# Altium PCB WG-DH-MB V1.0.PcbDoc
Units mil, origin at the board's own origin, x right, y up, seen from the top; angles counter-clockwise.
Board outline 3784.52 x 3519.17 mil, 4 copper layers (Top Layer, VCC, GND, Bottom Layer); 82 components, 63 nets, 293 pads, 116 vias.
Unrouted connection lines stored in the file: 2.
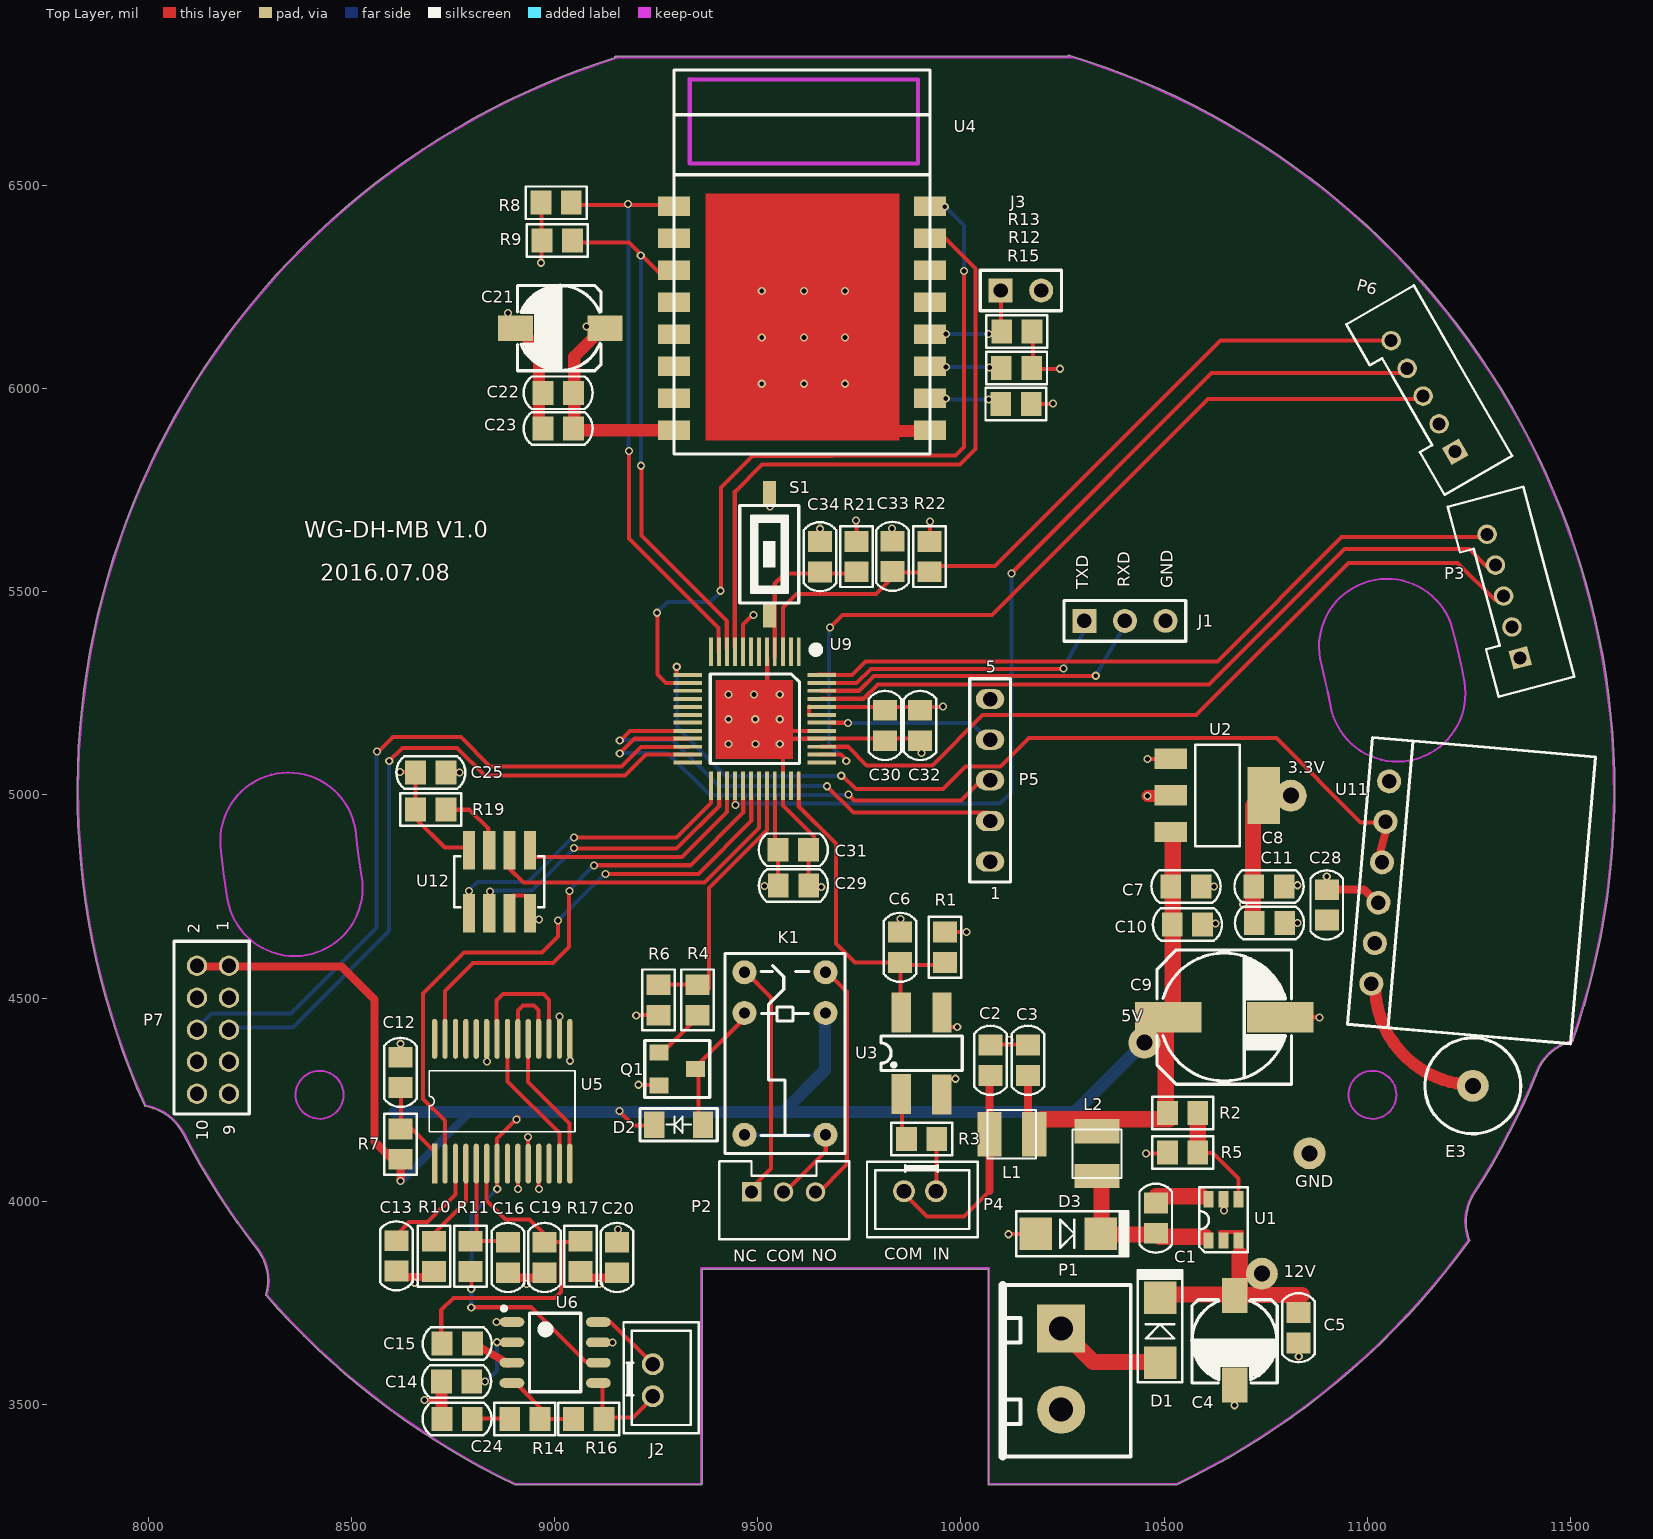
[diagram p0: Top Layer view]
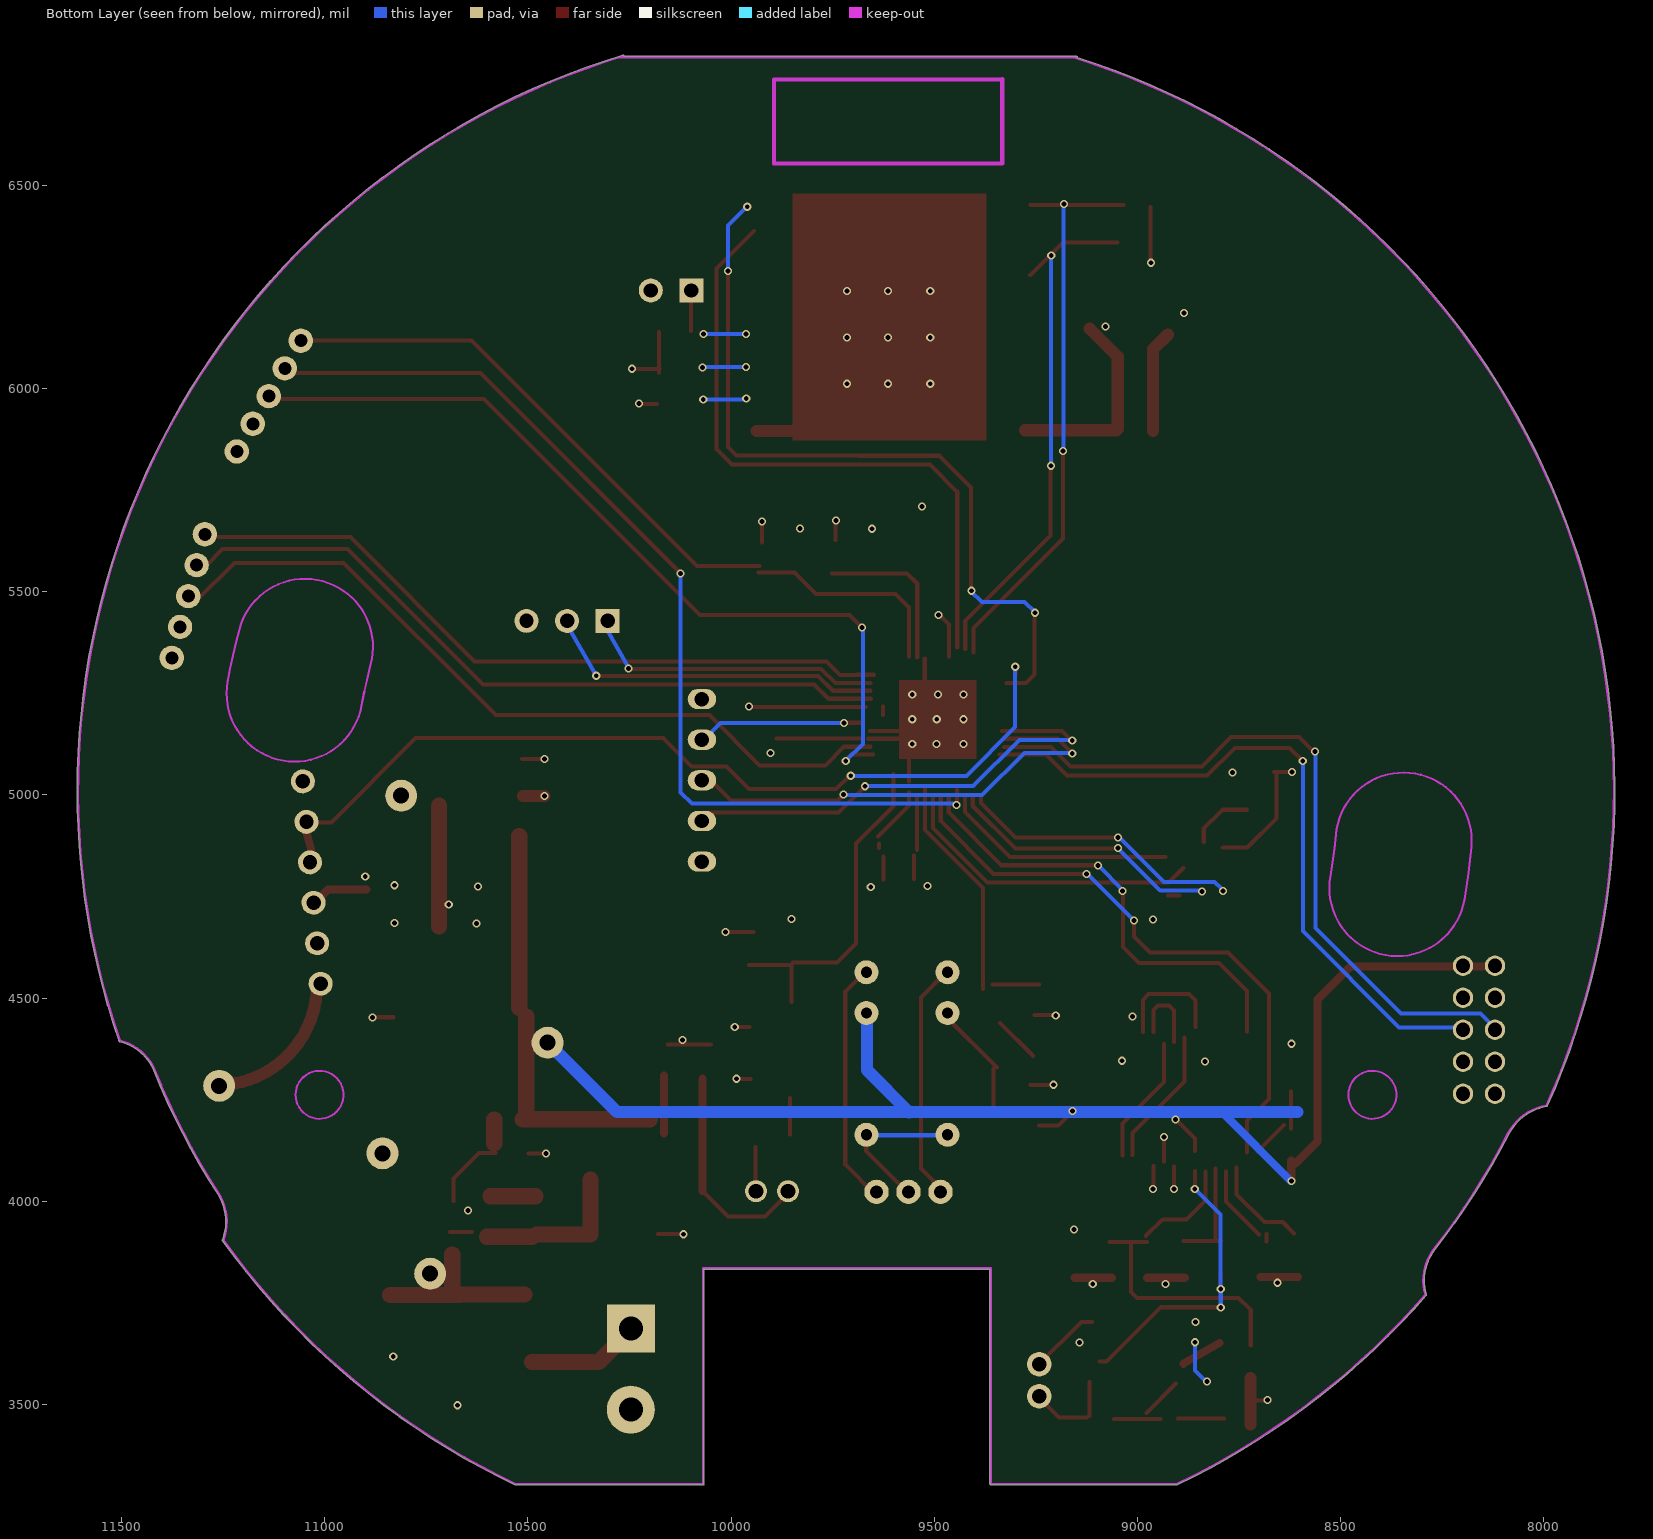
[diagram p1: Bottom Layer view, seen from below]
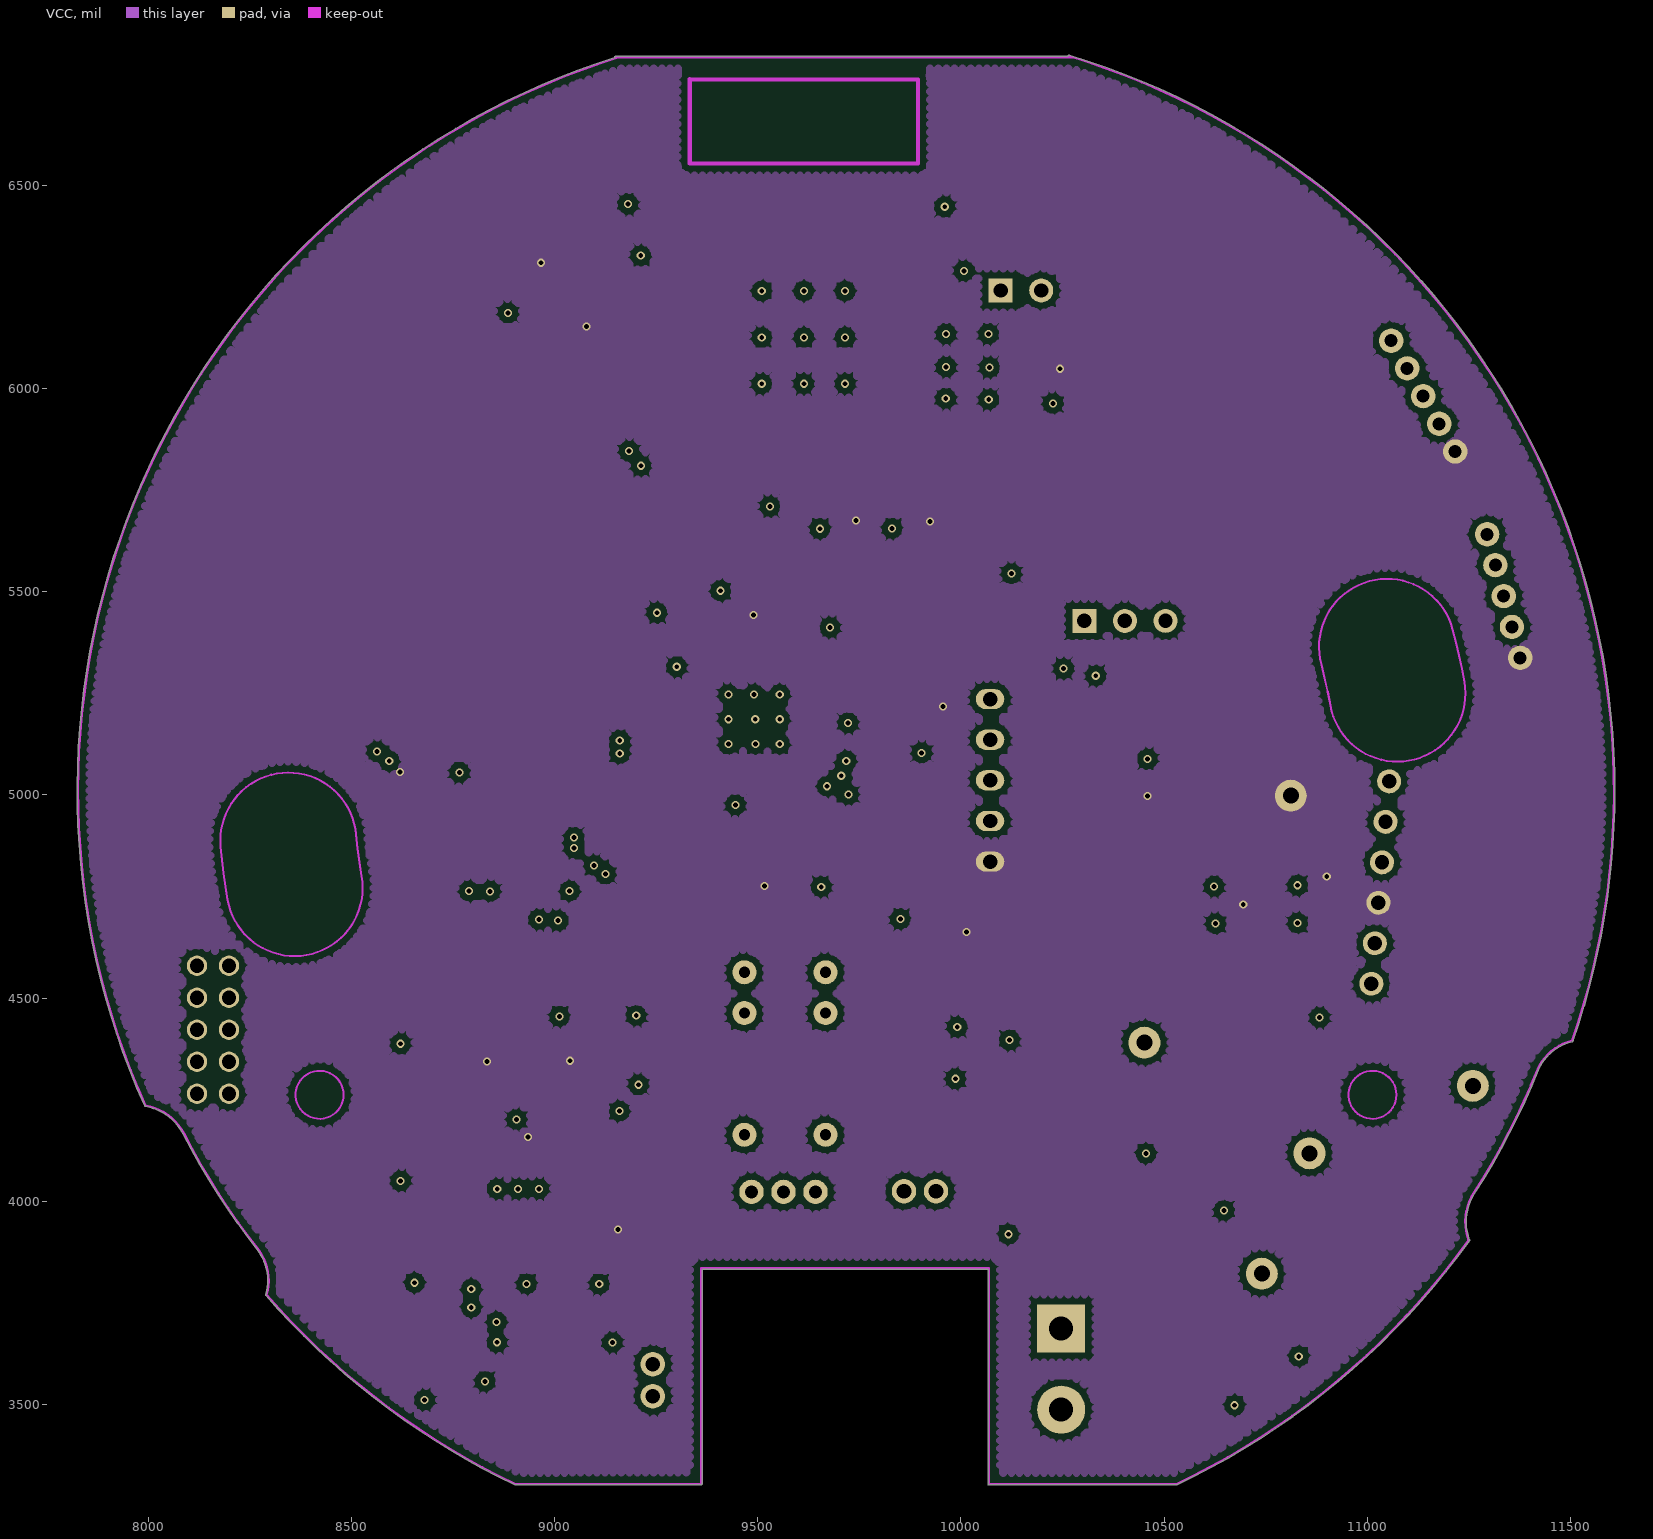
[diagram p2: VCC]
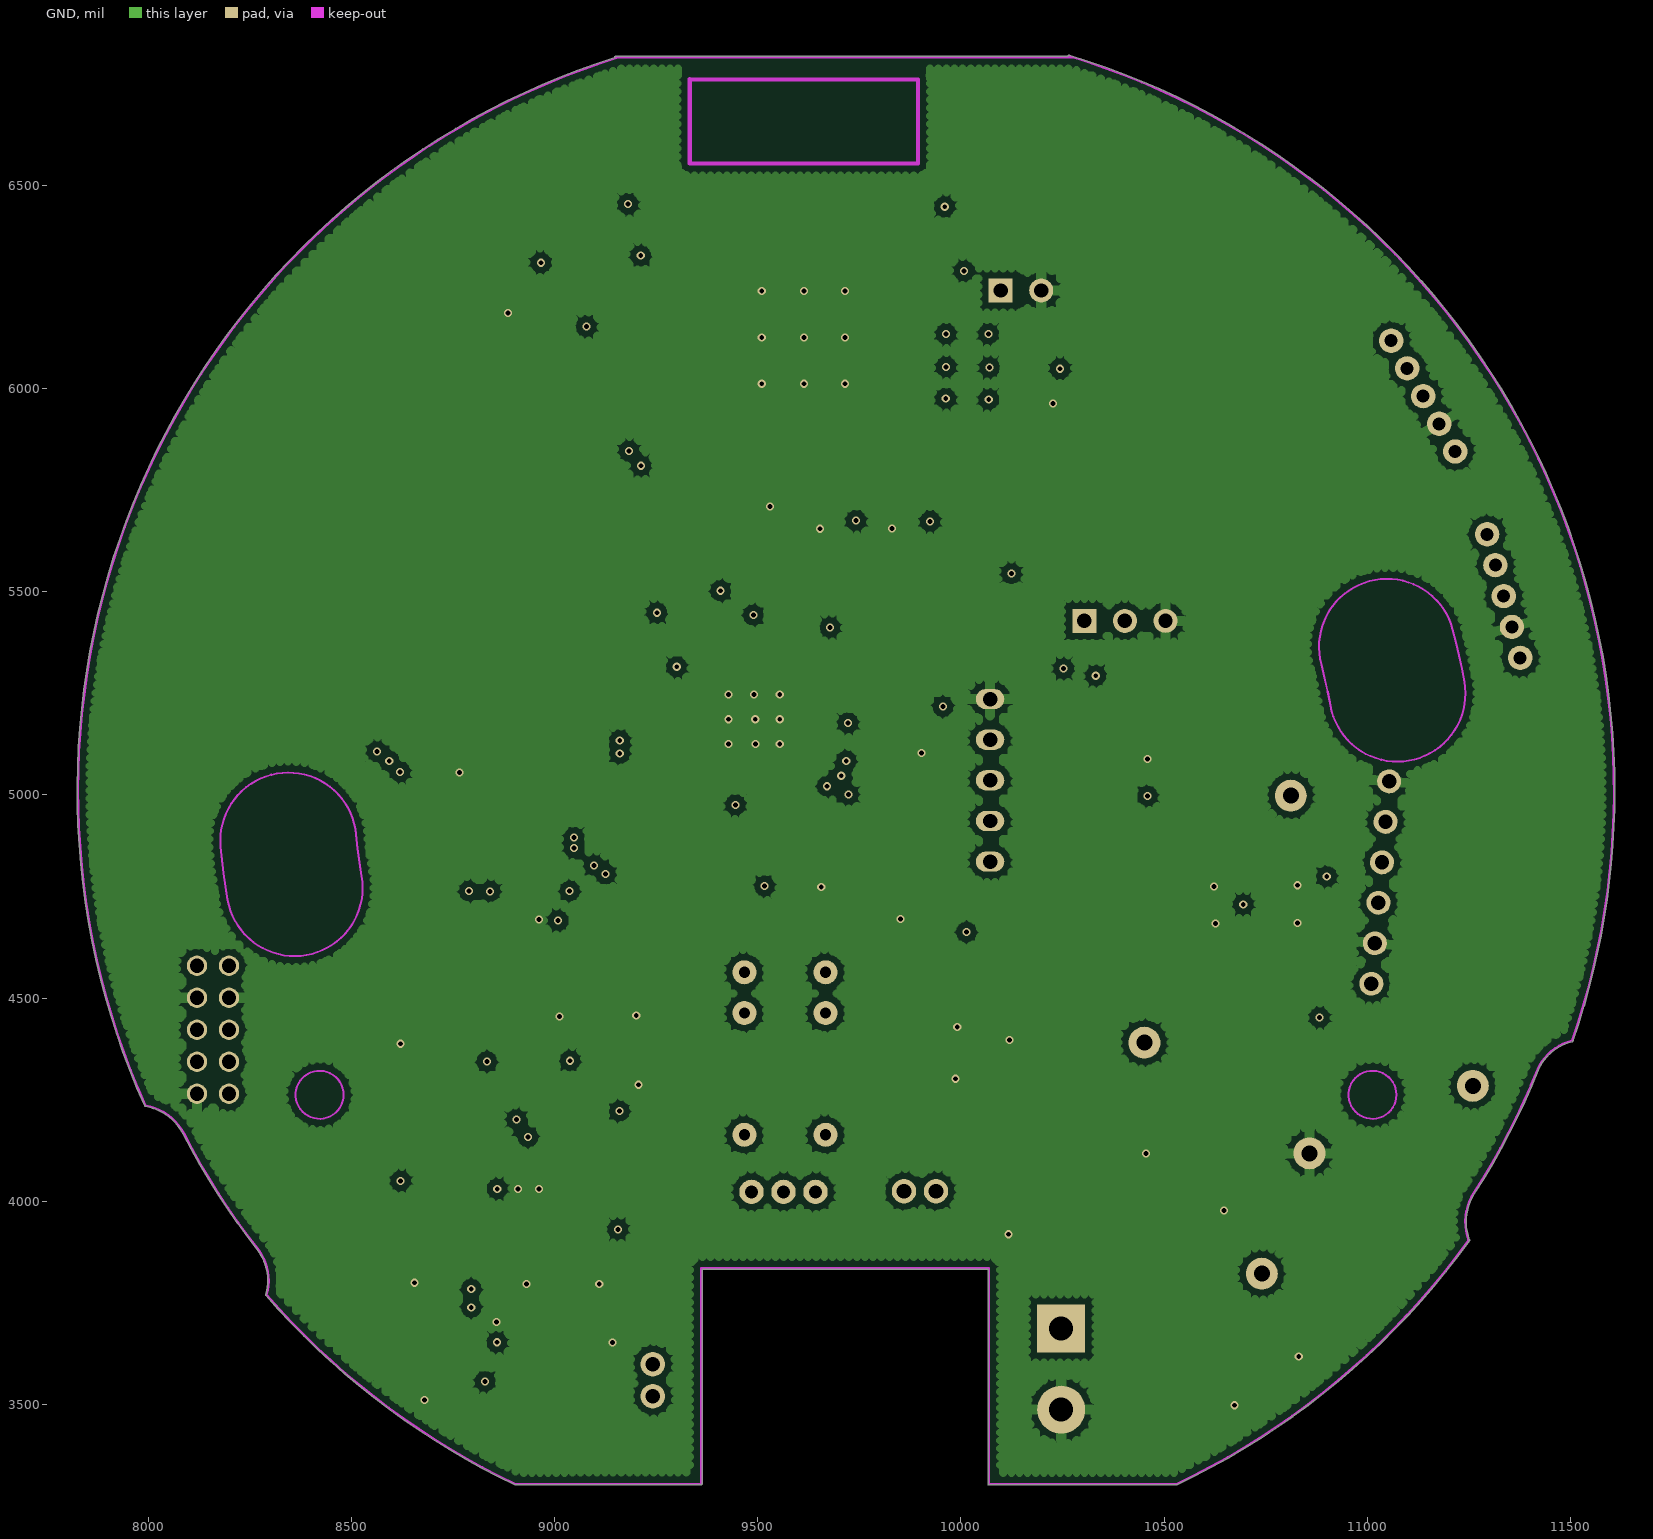
[diagram p3: GND]

## Layer stack, top to bottom
Top Layer: signal copper 1.4
Dielectric: core 12.6, FR-4, Dk 4.8
VCC: signal copper 1.4
Dielectric: prepreg 12.6, FR-4, Dk 4.8
GND: signal copper 1.4
Dielectric: core 12.6, FR-4, Dk 4.8
Bottom Layer: signal copper 1.4

## Board outline
8270.48,3877.31 ccw(c9717.08,5009.79) 8270.51,3877.27 8270.48,3877.31 cw(c8170.37,3805.04) 8293.84,3805.04 cw(c8170.37,3805.04) 8288.84,3770.24 ccw(c8291.25,3769.54) 8289.35,3767.89 ccw(c9717.08,5009.79) 8902.77,3301.68 ccw(c8903.85,3303.95) 8903.86,3301.44 9360.68,3302.48 ccw(c9360.67,3305) 9363.18,3305 9363.18,3832.64 10066.82,3832.64 10066.82,3303.95 ccw(c10069.33,3303.95) 10069.67,3301.46 ccw(c10070,3303.95) 10070,3301.44 10530.31,3301.44 ccw(c10530.31,3303.95) 10531.39,3301.68 ccw(c9717.08,5009.79) 11251.34,3902.19 ccw(c11249.3,3903.66) 11251.81,3903.66 ccw(c11249.3,3903.66) 11251.65,3904.57 cw(c11372.12,3949.28) 11263.92,4018.61 ccw(c9717.08,5009.79) 11421.14,4323.24 ccw(c9717.08,5009.79) 11421.16,4323.28 11421.14,4323.24 cw(c11533.78,4272.68) 11504.68,4392.67 ccw(c11504.08,4395.11) 11506.46,4394.29 ccw(c9717.08,5009.79) 11609.36,5009.79 ccw(c9717.08,5009.79) 10266.67,6820.5 ccw(c10265.94,6818.09) 10263.49,6817.51 9161.38,6817.51 ccw(c9159.84,6815.53) 9159.1,6817.93 ccw(c9717.08,5009.79) 9157.75,6817.51 9150,6817.51 ccw(c9150,6815) 9147.57,6814.33 ccw(c9717.08,5009.79) 7990.74,4234.88 ccw(c7993.04,4235.91) 7992.64,4233.43 ccw(c7971.13,4106.74) 7992.62,4233.43 7992.64,4233.43 cw(c7971.13,4106.74) 8085.26,4165.79 cw(c7971.13,4106.74) 8085.27,4165.77 ccw(c9717.08,5009.79)

## Design rules (kind name [scope] priority, off if disabled: settings)
Clearance [All] p1: gap=15
PolygonConnect isP7-1 [InComponent('P7')and InNet('VDD33')] p1: connectstyle=Relief reliefconductorwidth=25 reliefentries=4 polygonreliefangle="90 Angle"
PolygonConnect IsGndPin [IsPadHoleValid AND InNet('GND')] p2: connectstyle=Relief reliefconductorwidth=25 reliefentries=4 polygonreliefangle="90 Angle"
PolygonConnect IsVia [IsVia] p3: connectstyle=Direct reliefconductorwidth=10 reliefentries=4 polygonreliefangle="90 Angle"
PolygonConnect [All] p4: connectstyle=Direct reliefconductorwidth=20 reliefentries=4 polygonreliefangle="90 Angle"
RoutingVias [All] p1: holewidth=12 width=20 viastyle="Through Hole" minholewidth=12 minwidth=20 maxholewidth=12 maxwidth=20
SilkToSilkClearance [All] p1: silktosilkclearance=0
SilkscreenOverComponentPads [IsPad] p1: minsilkscreentomaskgap=0
SolderMaskExpansion [All] p1: expansion=4
Width [All] p1: maxlimit=100 minlimit=10 preferedwidth=10 midlayer1_maxwidth=10 midlayer2_maxwidth=10 minimp=50.000000 maximp=50.000000 favimp=50.000000
26 further rules are at their usual default settings.

## Components (designator, comment, footprint, x,y, rotation, side; value= is the part's Value field where it differs from the comment)
3.3V "5VOUT" TestPoint 10811.81,4998.03 r180 top (schematic designator 3)
5V "5VOUT" TestPoint 10451.57,4390.16 r90 top (schematic designator 2)
12V "5VOUT" TestPoint 10740.55,3821.65 r180 top (schematic designator 1)
C1 "22nF" "0805 - C" 10479.53,3958.27 r90 top
C2 "10uF" "0805 - C" 10072.83,4346.85 r90 top
C3 "10uF" "0805 - C" 10164.96,4346.85 r90 top
C4 "47uF/16V" smd_ec_d5.2 10673.62,3657.48 r180 top
C5 "0.1uF" "0805 - C" 10830.71,3688.58 r90 top
C6 "0.1uF" "0805 - C" 9850,4624.8 r270 top
C7 "0.1uF" "0805 - C" 10553.94,4774.8 r180 top
C8 "0.1uF" "0805 - C" 10758.27,4774.8 r180 top
C9 "220uF/25V" smd_ec_d8 10648.03,4453.15 r270 top
C10 "10uF" "0805 - C" 10557.48,4681.1 r0 top
C11 "10uF" "0805 - C" 10759.45,4684.65 r0 top
C12 "1uF" "0805 - C" 8620.47,4316.93 r270 top
C13 "0.1uF" "0805 - C" 8610.24,3865.35 r90 top
C14 "4.7uF" "0805 - C" 8758.66,3556.3 r180 top
C15 "0.1uF" "0805 - C" 8760.24,3649.21 r0 top
C16 "0.1uF" "0805 - C" 8885.04,3861.42 r90 top
C19 "0.1uF" "0805 - C" 8975.2,3861.42 r270 top
C20 "0.1uF" "0805 - C" 9153.54,3861.42 r270 top
C21 "47uF" SMD_EC_D5.2 9013.78,6148.82 r90 top
C22 "1uF" "0805 - C" 9008.66,5989.76 r180 top
C23 "10nF" "0805 - C" 9008.66,5901.97 r0 top
C24 "0.1uF" "0805 - C" 8759.84,3464.17 r0 top
C25 "0.1uF" "0805 - C" 8695.28,5055.12 r180 top
C28 "1uF" "0805 - C" 10900.39,4729.13 r270 top
C29 "10uF" "0805 - C" 9587.8,4776.77 r0 top
C30 "10uF" "0805 - C" 9812.99,5170.87 r270 top
C31 "0.1uF" "0805 - C" 9587.4,4864.96 r180 top
C32 "0.1uF" "0805 - C" 9899.61,5170.87 r90 top
C33 "1uF" "0805 - C" 9831.5,5587.01 r270 top
C34 "0.1uF" "0805 - C" 9653.15,5586.22 r270 top
D1 "1N5817" SMD_DIODE_SMA 10490.16,3692.52 r90 top
D2 "1N4148" 1n4148 9310.24,4188.19 r180 top
D3 "1N5817" SMD_DIODE_SMA 10274.41,3919.69 r0 top
E3 "Antenna" ant 11259.84,4283.86 r0 top
GND "5VOUT" TestPoint 10857.87,4117.72 r180 top (schematic designator GND1)
J1 "Header 3" HDR1X3 10303.54,5428.35 r0 top
J2 "喇叭接口" CN_1X2_P200#1 9242.13,3559.06 r270 top
J3 "Jumper" HDR1X2 10097.6,6241.48 r0 top
K1 "HFD41" HFD23 9566.93,4363.39 r0 top
L1 "4.7uH" SMD_L_3015 10125.2,4164.57 r0 top
L2 "4.7uH" SMD_L_3015 10335.04,4116.93 r90 top
P1 "Header 2" CON2-5.08 10246.85,3687.01 r270 top
P2 "Header 3" CN_1X3_P200 9564.57,3983.07 r180 top
P3 "Header 5" CN_1X5_P200 11335.83,5489.37 r285 top
P4 "Header 2" CN_1X2_P200#2 9898.82,4024.02 r180 top
P5 "Header 5" HDR1X5 10071.65,4835.83 r90 top locked
P6 "Header 5" CN_1X5_P200 11137.8,5981.5 r300 top
P7 "Header 5X2" HDR2X5 8198.43,4264.57 r90 top
Q1 "NPN" SOT23 9301.97,4325.2 r270 top
R1 "10K" "0805 - R" 9960.24,4624.8 r270 top
R2 "150K" "0805 - R" 10545.67,4217.32 r180 top
R3 "1K" "0805 - R" 9903.15,4153.54 r0 top
R4 "4.7K" "0805 - R" 9351.97,4495.28 r270 top
R5 "28.7K" "0805 - R" 10545.67,4120.08 r0 top
R6 "10K" "0805 - R" 9255.51,4495.28 r270 top
R7 "10" "0805 - R" 8620.47,4140.55 r90 top
R8 "10K" "0805 - R" 9003.68,6457.47 r180 top
R9 "10K" "0805 - R" 9006.19,6364.21 r180 top
R10 "300K" "0805 - R" 8703.15,3864.17 r270 top
R11 "1K" "0805 - R" 8793.31,3864.17 r270 top
R12 "10K" "0805 - R" 10136.85,6050.78 r0 top
R13 "10K" "0805 - R" 10137.69,6140.7 r0 top
R14 "3K" "0805 - R" 8926.77,3464.17 r0 top
R15 "10K" "0805 - R" 10135.46,5961.98 r180 top
R16 "75K" "0805 - R" 9083.86,3464.17 r180 top
R17 "1K" "0805 - R" 9063.71,3864.17 r90 top
R19 "10K" "0805 - R" 8695.28,4964.57 r180 top
R21 "10K" "0805 - R" 9742.91,5586.61 r270 top
R22 "10K" "0805 - R" 9922.44,5586.61 r270 top
S1 "SW-PB" SW_SMD_2P 9528.35,5592.52 r90 top
U1 "ACT4088" SOT23-6 10646.46,3953.94 r0 top
U2 "LM1117-3.3" SOT223 10655.91,4998.82 r270 top
U3 "EL357N" SOP4 9853.15,4263.39 r90 top
U4 "ESP-12F" WIFI-ESP 9608.66,5839.37 r0 top
U5 "WT588D08" WT588D08 8704.72,4092.52 r90 top locked
U6 "MC34119" MC34119 9001.18,3627.56 r0 top locked
U9 "LPC1125FBD48/333" TQFP48 9492.91,5187.4 r270 top locked
U11 "TDH0018" TDH0018 11256.69,4764.57 r265 top locked
U12 "W25Q16" CN_4X2P_1.27MM 8868.5,4785.04 r0 top

## Footprints (in the part's own frame and the unit in brackets; to place one, negate y for a bottom-side part, rotate by r counter-clockwise, add the part's x,y. Pads: shape width x height; smd on the part's side, far side on the other; paste and mask are expansions set on the pad)
1n4148 [mil] "1N4148"
  rect 50x64.2 smd: 1(-54.7,0) 2(64.9,0)
  silkscreen extent -90,-40 100,40
"0805 - C" [mm] "SMD_CAP_0805"
  rect 1.3x1.5 smd: 1(-0.95,0) 2(0.95,0)
  silkscreen extent -2.16,-1.02 2.16,1.02
"0805 - R" [mm]
  rect 1.3x1.5 smd: 1(-0.95,0) 2(0.95,0)
  silkscreen extent -1.91,-1.02 1.91,1.02
ant [mm]
  round 2 hole 1: 1(0,0)
  silkscreen extent -3,-3 3,3
CN_1X2_P200#1 [mil]
  round 54 / inner round 60 / far side round 60 hole 36: 1(38.99,-0.51) 2(-39.75,-0.51)
  silkscreen extent -143,-73 130,113
CN_1X2_P200#2 [mil]
  round 54 / inner round 60 / far side round 54 hole 36: 1(38.99,-0.51) 2(-39.75,-0.51)
  silkscreen extent -143,-73 130,113
CN_1X3_P200 [mil]
  rect 48x48 / inner round 60 / far side round 60 hole 32: 1(80,-39.69)
  round 48 / inner round 60 / far side round 60 hole 32: 2(1.26,-39.69) 3(-77.48,-39.69)
  silkscreen extent -160,-115 159,76
CN_1X5_P200 [mil]
  rect 48x48 / inner round 60 / far side round 60 hole 32: 1(157.48,0)
  round 48 / inner round 60 / far side round 60 hole 32: 2(78.74,0) 3(0,0) 4(-78.74,0) 5(-157.48,0)
  silkscreen extent -248,-76 236,116
CN_4X2P_1.27MM [mil]
  rect 30x95 smd: 1(-79.4,-76.5) 2(-29.4,-76.5) 3(20.6,-76.5) 4(70.6,-76.5) 5(70.6,78.5) 6(20.6,78.5) 7(-29.4,78.5) 8(-79.4,78.5)
  silkscreen extent -116,-62 106,64
CON2-5.08 [mm]
  rect 3x3 hole 1.5: 1(0,0)
  round 3 hole 1.5: 2(5.08,0)
  silkscreen extent -2.7,-3.66 8,4.34
HDR1X2 [mm] "Connector; Header; 2 Position"
  rect 1.5x1.5 hole 0.9: 1(0,0)
  round 1.5 hole 0.9: 2(2.54,0)
  silkscreen extent -1.27,-1.27 3.81,1.27
HDR1X3 [mm] "Connector; Header; 3 Position"
  rect 1.5x1.5 hole 0.9: 1(0,0)
  round 1.5 hole 0.9: 2(2.54,0) 3(5.08,0)
  silkscreen extent -1.27,-1.27 6.35,1.27
HDR1X5 [mil] "Connector; Header; 5x2 Position"
  oval 50x70 hole 35.43: 1(0,0) 2(100,0) 3(200,0) 4(300,0) 5(400,0)
  silkscreen extent -50,-50 450,50
HDR2X5 [mm] "Connector; Header; 5x2 Position"
  round 1.27 hole 0.9: 1(8,0) 2(8,2) 3(6,0) 4(6,2) 5(4,0) 6(4,2) 7(2,0) 8(2,2) 9(0,0) 10(0,2)
  silkscreen extent -1.27,-1.27 9.53,3.43
HFD23 [mm]
  round 1.5 hole 0.7: 1(-2.54,-5.08) 1(2.54,-5.08) 2(-2.54,5.08) 3(2.54,5.08) 4(-2.54,2.54) 5(2.54,2.54)
  silkscreen extent -3.75,-6.25 3.75,6.25
MC34119 [mm]
  oval 1.55x0.6 smd: 1(-2.7,1.905) 2(-2.7,0.635) 3(-2.7,-0.635) 4(-2.7,-1.905) 5(2.7,-1.905) 6(2.7,-0.635) 7(2.7,0.635) 8(2.7,1.905)
  silkscreen extent -3.32,-2.45 1.6,2.87
SMD_DIODE_SMA [mil] "SMD_DIODE_SMA"
  rect 80x80 smd: 1(-90.5,0) 2(69.5,0)
  silkscreen extent -138,-55 140,55
smd_ec_d5.2 [mm]
  rect 1.6x2.2 smd: 1(0,-2.794) 2(0,2.794)
  silkscreen extent -2.67,-2.54 2.67,2.67
SMD_EC_D5.2 [mm]
  rect 1.6x2.2 smd: 1(0,-2.794) 2(0,2.794)
  silkscreen extent -2.67,-2.54 2.67,2.67
smd_ec_d8 [mm]
  rect 1.9x4.15 smd: 1(0,-3.5) 2(0,3.5)
  silkscreen extent -4.2,-4.2 4.2,4.2
SMD_L_3015 [mil] "SMD_3015"
  rect 60x110 smd: 1(-55,0) 2(55,0)
  silkscreen extent -60,-60 60,60
SOP4 [mm]
  rect 2.5x1.2 smd: 1(0,0) 2(-0.01,-2.53) 3(5.12,-2.54) 4(5.12,0)
  silkscreen extent 1.48,-3.81 3.64,1.27
SOT23 [mm] "SOT23"
  rect 1x1.2 smd: 1(0,1.141) 2(-1.021,-1.141) 3(1.021,-1.14)
  silkscreen extent -1.78,-2.03 1.78,2.03
SOT23-6 [mil] "SOT23-6"
  rect 25x40 smd: 1(-37,-51) 2(0,-51) 3(37,-51) 4(37,51) 5(0,51) 6(-37,51)
  silkscreen extent -60,-80 60,80
SOT223 [mil] "SOT223"
  rect 50x80 smd: 1(-90.2,-139.8) 2(0,-139.8) 3(90.2,-139.8)
  rect 140x80 smd: 4(0,90)
  silkscreen extent -125,-80 125,30
SW_SMD_2P [mil] "SMD_SW_2P"
  rect 60x32 smd: 1(150,0) 2(-150,0)
  silkscreen extent -120,-73 120,73
TDH0018 [mm]
  round 1.5 hole 0.9: 1(-6.35,-5.73) 2(-3.81,-5.73) 3(-1.27,-5.73) 4(1.27,-5.73) 5(3.81,-5.73) 6(6.35,-5.73)
  silkscreen extent -9,-7 9,7
TestPoint [mm]
  round 2 hole 1: 1(0,0)
TQFP48 [mil] "TQFP48"
  rect 70.1x9.8 smd: 1(-165,107.9) 2(-165,89) 3(-165,68.9) 4(-165,48.8) 5(-165,29.9) 6(-165,9.8) 7(-165,-9.8) 8(-165,-29.1) 9(-165,-48.8) 10(-165,-68.9) 11(-165,-88.2) 12(-165,-107.9) 25(165,-107.9) 26(165,-88.2) 27(165,-68.9) 28(165,-48.8) 29(165,-29.1) 30(165,-9.8) 31(165,9.8) 32(165,29.9) 33(165,48.8) 34(165,68.9) 35(165,89) 36(165,107.9)
  rect 9.8x70.1 smd: 13(-107.9,-165) 14(-88.2,-165) 15(-68.9,-165) 16(-48.8,-165) 17(-29.1,-165) 18(-9.8,-165) 19(9.8,-165) 20(29.9,-165) 21(48.8,-165) 22(68.9,-165) 23(88.2,-165) 24(107.9,-165) 37(107.9,165) 38(88.2,165) 39(68.9,165) 40(48.8,165) 41(29.9,165) 42(9.8,165) 43(-9.8,165) 44(-29.1,165) 45(-48.8,165) 46(-68.9,165) 47(-88.2,165) 48(-107.9,165)
  silkscreen extent -184,-110 110,164
WIFI-ESP [mm]
  rect 2x1.2 smd: 1(-8,15.48) 2(-8,13.48) 3(-8,11.48) 4(-8,9.48) 5(-8,7.48) 6(-8,5.48) 7(-8,3.48) 8(-8,1.48) 15(8,1.48) 16(8,3.48) 17(8,5.48) 18(8,7.48) 19(8,9.48) 20(8,11.48) 21(8,13.48) 22(8,15.48)
  silkscreen extent -8,0 8,24
WT588D08 [mm]
  rect 2.5x0.33 smd: 1(0,0)
  oval 2.5x0.33 smd: 2(0,-0.65) 3(0,-1.3) 4(0,-1.95) 5(0,-2.6) 6(0,-3.25) 7(0,-3.9) 8(0,-4.55) 9(0,-5.2) 10(0,-5.85) 11(0,-6.5) 12(0,-7.15) 13(0,-7.8) 14(0,-8.45) 15(7.8,-8.45) 16(7.8,-7.8) 17(7.8,-7.15) 18(7.8,-6.5) 19(7.8,-5.85) 20(7.8,-5.2) 21(7.8,-4.55) 22(7.8,-3.9) 23(7.8,-3.25) 24(7.8,-2.6) 25(7.8,-1.95) 26(7.8,-1.3) 27(7.8,-0.65) 28(7.8,0)
  silkscreen extent 1.98,-8.78 5.82,0.33

## Part data
3.3V 5V 12V GND: library part TESTPOINT
C1 C5 C6 C7 C8 C12 C13 C14 C15 C16 C19 C20 C23 C24 C25 C31 C32 C33 C34: library part Cap, "Capacitor"
C2 C3 C4 C9 C10 C11 C21 C22 C28 C29 C30: library part "Cap Pol1", "Polarized Capacitor (Radial)"
D1 D2 D3: library part Diode, "Default Diode"
E3: "Generic Antenna"
J1 P2: "Header, 3-Pin"
J2: library part "Header 2", "Header, 2-Pin"
J3: "Jumper Wire"
K1: library part Relay-SPDT, "Single-Pole Dual-Throw Relay"
L1 L2: library part Inductor, "Inductor"
P1 P4: "Header, 2-Pin"
P3 P5 P6: "Header, 5-Pin"
P7: "Header, 5-Pin, Dual row"
Q1: "NPN Bipolar Transistor"
R1 R2 R3 R4 R5 R6 R7 R8 R9 R10 R11 R12 R13 R14 R15 R16 R17 R21 R22: library part Res1, "Resistor"
R19: library part Res3, "Resistor"
S1: "Switch"
U2: library part LM1117_1
U3: library part Optoisolator1, "4-Pin Phototransistor Optocoupler"
U12: library part MX25Lxx

## Via types
v1: diameter 20, hole 12, Top Layer to Bottom Layer, 116 vias

## Nets (pads, with @x,y where several pads share a name; then routed paths per layer and width w, separated by ;. In a path a pad name is that pad's centre, name@x,y a point inside that pad or via, vN(x,y) a via of type N, cw(c..) or ccw(c..) an arc to the next point about the centre after c; other vN are vias at no path point)
AUDIOINPUT: C15.1 C19.1 R17.2 U5.6 | length 867.9
  Top Layer w10: C15.1@8720.87,3645.28 8720.87,3731.89 8750.79,3761.81 9001.18,3761.81 9015.77,3776.4 9015.77,3899.46 ; U5.6@8832.68,4072.44 8832.68,4001.57 8879.13,3955.12 8938.58,3955.12 C19.1@8978.74,3914.96 ; C19.1@8976.77,3900 R17.2@9068.9,3900
BLE_RX: P7.6 U9.22 | length 1810.3
  Top Layer w10: v1@8562.6,5103.15 8601.57,5142.13 8769.29,5142.13 8841.34,5070.08 9164.57,5070.08 9212.61,5118.12 U9.22@9327.95,5118.12
  Bottom Layer w10: P7.6@8116.63,4422.93 8155.51,4461.81 8350.79,4461.81 8561.81,4672.83 v1@8561.81,5103.15
  other v1: 8562.6,5106.69
BLE_TX: P7.5 U9.23 | length 1727.2
  Top Layer w10: v1@8591.54,5082.09 8625.2,5115.75 8759.84,5115.75 8828.35,5047.24 9172.83,5047.24 9224.82,5099.23 U9.23@9339.37,5099.23
  Bottom Layer w10: P7.5@8191.73,4427.56 8355.51,4427.56 8592.52,4664.57 v1@8592.52,5081.1
  other v1: 8592.91,5083.07
BOOT: C34.2 R21.2 S1.2 U9.4 | length 402
  Top Layer w10: U9.4@9541.74,5338.58 9541.74,5520.09 9566.54,5544.88 R21.2@9751.97,5544.88
BUSY: U5.2 U9.30 | length 1477.9
  Top Layer w10: U5.2@8730.32,4120.47 8730.31,4198.03 8676.38,4251.97 8676.38,4511.42 8776.77,4611.81 8969.29,4611.81 9008.66,4651.18 v1@9008.66,4689.76 ; v1@9120.47,4805.51 9353.54,4805.51 9483.86,4935.83 U9.30@9483.86,4995.67
  Bottom Layer w10: v1@9009.65,4692.32 v1@9121.85,4804.53
  other v1: 9008.66,4690.55 9124.8,4805.12
COM1: K1.1 P2.2 | length 353.7
  Top Layer w10: P2.2@9565.35,4021.65 9667.32,4123.62 K1.1@9667.32,4174.41
  Bottom Layer w10: K1.1@9486.37,4162.29 K1.1@9645.05,4162.29
DATA: U5.27 U9.29 | length 1125.5
  Top Layer w10: U5.27@8730.32,4418.11 8730.31,4517.72 8799.21,4586.61 8996.46,4586.61 9035.83,4625.98 v1@9035.83,4759.06 ; v1@9097.64,4826.77 9334.25,4826.77 9464.17,4956.69 U9.29@9464.17,4994.49
  Bottom Layer w10: v1@9036.22,4766.14 v1@9095.87,4825.79
  other v1: 9037.01,4763.39 9097.24,4826.38
FLH_NSCS: U9.25 U12.1 | length 692.7
  Top Layer w10: v1@9046.06,4895.28 9299.61,4895.28 9384.65,4980.31 U9.25@9384.65,4996.06
  Bottom Layer w10: v1@8793.31,4769.29 8809.84,4785.83 8934.25,4785.83 v1@9044.09,4895.67
  other v1: 8789.37,4762.99 9048.03,4894.88
GND: C2.2 C3.2 C4.2 C5.1 C6.1 C7.1 C8.1 C9.2 C10.2 C11.2 C12.1 C13.1 C14.2 C16.1 C19.2 C20.2 C21.2 C22.2 C23.1 C24.1 C25.1 C28.2 C29.2 C30.2 C31.1 C32.1 C33.1 C34.1 D3.1 GND.1 J1.3 J3.2 P1.2 P3.2 P5.5 P6.2 P7.3 P7.4 P7.10 Q1.3 R5.1 R6.2 R10.2 R15.1 R17.1 S1.1 U1.5 U2.1 U3.2 U3.3 U4.15 U5.9 U5.11 U5.16 U6.1 U6.7 U9.5 U9.34 U9.40 U9.41 U11.1 U11.5 U12.3 U12.4 | length 2231.9
  Top Layer w10: v1@8680.32,3509.06 8718.11,3509.06 ; U12.3@8896.85,4752.36 U12.4@8924.41,4752.36 ; v1@8909.52,4028.76 U5.9@8909.52,4085.55 ; v1@8960.31,4029.55 U5.11@8960.31,4086.34 ; v1@9201.18,4458.13 R6.2@9253.64,4458.13 ; v1@9210.24,4285.69 Q1.3@9262.7,4285.69 ; 9523.23,5244.88 U9.5@9523.23,5335.43 ; U9.34@9561.81,5005.51 9561.81,4973.62 9637.99,4897.44 ; U9.34@9562.2,5033.07 v1@9562.2,5123.62 ; 9566.93,5157.48 U9.41@9657.48,5157.48 ; 9572.44,5138.19 U9.40@9662.99,5138.19 ; C29.2@9625.2,4791.34 C31.1@9625.2,4848.82 ; C31.1@9635.83,4869.29 C31.1@9635.83,4880.71 ; U9.40@9678.74,5138.58 C32.1@9888.58,5138.58 ; U3.2@9951.97,4300.79 v1@9984.61,4300.79 ; U3.3@9955.15,4428.35 v1@9987.8,4428.35 ; C2.2@10050,4385.43 C3.2@10155.51,4385.43 ; v1@10116.1,3919.29 D3.1@10180.32,3919.29 ; R15.1@10181.96,5962.18 v1@10225.94,5962.26 ; v1@10457.48,4116.93 R5.1@10498.82,4116.93 ; v1@10462.2,5088.58 U2.1@10514.96,5088.58 ; C9.2@10830.32,4452.76 10883.07,4452.76
  Top Layer w20: C13.1@8604.72,3813.78 R10.2@8696.85,3813.78 ; C16.1@8883.46,3811.42 C19.2@8975.59,3811.42 ; R17.1@9062.99,3811.42 C20.2@9155.12,3811.42
  Top Layer w30: C24.1@8721.26,3450.39 C14.2@8721.26,3564.17 ; C21.2@8924.41,6133.46 8961.24,6096.64 C23.1@8961.24,5896.46 ; 9837.35,5895.58 U4.15@9936.57,5895.58
  other v1: 10673.62,3497.64 8679.92,3510.24 10831.5,3618.11 9142.13,3651.97 8857.09,3702.76 8931.1,3796.46 9109.84,3796.06 8655.51,3799.21 10116.93,3918.5 10647.24,3977.17 8909.45,4030.31 8961.02,4030.31 10455.51,4117.32 9206.3,4286.61 9986.22,4301.18 8620.87,4387.4 10119.68,4396.46 9990.94,4428.74 9011.81,4454.72 9200.79,4457.09 10626.77,4683.07 10828.74,4684.25 8961.02,4693.31 9850.79,4694.49 9656.3,4773.62 10623.23,4774.8 10828.74,4777.56 8765.75,5055.51 10459.06,5088.19 9903.15,5103.54 9427.56,5125.2 9494.09,5125.2 9553.94,5125.2 9427.56,5186.22 9493.7,5186.22 9553.94,5186.22 9427.56,5246.85 9490.75,5246.85 9553.94,5246.85 9652.76,5655.12 9830.71,5655.91 9529.92,5710.24 10226.49,5963.37 9509.84,6011.81 9613.39,6011.81 9714.96,6011.81 9509.84,6125.98 9613.39,6125.98 9714.96,6125.98 8885.43,6186.22 9509.84,6240.16 9613.39,6240.16 9714.96,6240.16
GPIO0: J3.1 R13.1 U4.18 | length 203.8
  Top Layer w10: R13.1@10099.13,6141.39 J3.1@10099.13,6240.6
  Bottom Layer w10: v1@9963.25,6134.58 v1@10067.81,6134.58
  other v1: 9963.14,6134.3 10068.09,6134.58
GPIO2: R12.1 U4.17 | length 104.6
  Bottom Layer w10: v1@9964.92,6053.29 v1@10069.48,6053.29
  other v1: 10070.32,6052.18 9963.42,6053.29
GPIO15: R15.2 U4.16 | length 104.6
  Bottom Layer w10: v1@9962.13,5973.67 v1@10066.7,5973.67
  other v1: 10068.37,5973.39 9962.58,5975.62
IN_SIG1: C6.2 R1.2 U3.4 U9.36 | length 865
  Top Layer w10: U9.36@9600.39,4988.58 U9.36@9600.39,5051.18 ; U9.36@9600.79,5027.56 9600.79,4971.65 9692.13,4880.32 9692.13,4634.65 9739.76,4587.01 C6.2@9848.03,4587.01 ; U3.4@9850.79,4490.55 9850.79,4581.1 R1.2@9956.3,4581.1
IR_RX: P5.3 U9.21 | length 1138.9
  Top Layer w10: v1@9160.63,5102.76 9196.08,5138.2 U9.21@9329.92,5138.2 ; v1(9723.23,5000.79) 9737.4,4986.61 10000,4986.61 P5.3@10048.82,5035.43
  Bottom Layer w10: v1@9162.79,5103.6 9277.9,5103.6 9382.29,4999.21 v1@9722.83,4999.21
  other v1: 9160.24,5102.1
IR_TX: P5.2 U9.20 | length 1165.8
  Top Layer w10: v1@9159.45,5131.5 9185.45,5157.49 U9.20@9333.46,5157.49 ; v1@9669.09,5022.24 9735.04,4956.3 P5.2@10066.54,4956.3
  Bottom Layer w10: v1@9162.4,5135.49 9290.5,5135.49 9403.94,5022.05 v1@9671.65,5022.05
  other v1: 9670.47,5021.26 9160.24,5134.25
LED_B: P3.5 U9.48 | length 1808.1
  Top Layer w10: U9.48@9648.43,5295.67 U9.48@9690.16,5295.67 ; U9.48@9659.84,5295.28 9731.5,5295.28 9764.96,5328.74 10631.1,5328.74 10936.61,5634.25 P3.5@11285.83,5634.25
LED_G: P3.4 U9.45 | length 1808.6
  Top Layer w10: U9.45@9655.91,5236.61 9760.24,5236.61 9795.27,5271.65 10610.63,5271.65 10944.09,5605.12 11251.18,5605.12 P3.4@11294.09,5562.2
LED_R: P3.3 U9.39 | length 1920.5
  Top Layer w10: U9.39@9656.69,5118.5 9722.44,5118.5 9768.11,5072.83 9929.53,5072.83 10053.54,5196.85 10580.32,5196.85 ; 10580.32,5197.64 10953.94,5571.26 11222.44,5571.26 P3.3@11314.17,5479.53
NC1: K1.2 P2.1 | length 583.4
  Top Layer w10: K1.2@9472.83,4561.42 9532.68,4501.58 9532.68,4080.71 P2.1@9477.56,4025.59
NetC1_1: C1.1 D3.2 L2.1 U1.1 | length 370.1
  Top Layer w40: D3.2@10345.67,3917.72 L2.1@10345.67,4052.76 ; D3.2@10355.12,3917.72 C1.1@10479.13,3917.72 ; C1.1@10489.76,3912.6 U1.1@10600.79,3912.6
NetC1_2: C1.2 U1.6 | length 111
  Top Layer w40: C1.2@10481.1,4012.2 10592.13,4012.2
NetC12_2: C12.2 R7.2 U5.1 | length 184
  Top Layer w10: R7.2@8621.65,4178.35 C12.2@8621.65,4270.47 ; R7.2@8638.98,4187.8 U5.1@8703.94,4122.83
NetC13_2: C13.2 U5.3 | length 247.8
  Top Layer w10: C13.2@8614.17,3920.47 8642.13,3948.43 8687.4,3948.43 8755.91,4016.93 U5.3@8755.91,4083.07
NetC14_1: C14.1 U6.2 | length 110.5
  Bottom Layer w10: v1@8832.68,3557.48 8858.51,3583.31 v1@8858.51,3657.28
  other v1: 8828.74,3556.3 8857.87,3652.76
NetC15_2: C15.2 U6.3 | length 101.9
  Top Layer w20: C15.2@8797.98,3650.94 U6.3@8886.22,3600
NetC16_2: C16.2 R11.1 U5.5 | length 264.6
  Top Layer w10: R11.1@8794.49,3901.97 C16.2@8886.61,3901.97 ; R11.1@8807.48,3907.87 U5.5@8807.48,4080.31
NetC24_2: C24.2 R14.1 | length 113.8
  Top Layer w10: C24.2@8786.61,3465.35 R14.1@8900.39,3465.35
NetD1_1: D1.1 P1.1 | length 243.6
  Top Layer w40: P1.1@10269.68,3660.24 10325.59,3604.33 D1.1@10490.16,3604.33
NetD2_1: D2.1 K1.4 Q1.1 | length 292.2
  Top Layer w10: Q1.1@9346,4328.8 K1.4@9471.59,4454.39 ; D2.1@9353.94,4211.81 Q1.1@9353.94,4326.38
NetE3_1: E3.1 U11.6 | length 387.5
  Top Layer w30: U11.6@11019.29,4529.14 ccw(c11265.94,4532.48) E3.1@11269.29,4285.83
NetJ2_1: J2.1 R16.1 U6.5 | length 221.9
  Top Layer w10: R16.1@9117.72,3471.65 U6.5@9117.72,3554.72 ; R16.1@9125.2,3467.72 9193.31,3467.72 J2.1@9243.31,3517.72
NetJ2_2: J2.2 U6.8 | length 181.3
  Top Layer w10: U6.8@9111.81,3703.15 9137.79,3703.15 J2.2@9247.64,3593.31
NetP4_2: P4.2 R3.2 | length 88.5
  Top Layer w10: P4.2@9939.99,4044.34 R3.2@9939.99,4132.86
NetQ1_2: Q1.2 R4.2 | length 114.6
  Top Layer w10: Q1.2@9256.64,4357.94 R4.2@9337.65,4438.95
NetR2_1: R2.1 R5.2 U1.4 | length 244.8
  Top Layer w10: R5.2@10579.53,4118.9 10620.87,4118.9 10683.46,4056.3 U1.4@10683.46,4000.79
  Top Layer w40: R5.2@10583.07,4141.73 R2.1@10583.07,4201.18
NetR3_1: R3.1 U3.1 | length 90.6
  Top Layer w10: R3.1@9855.12,4163.78 U3.1@9855.12,4254.33
NetR10_1: R10.1 U5.4 | length 206.4
  Top Layer w10: R10.1@8682.28,3900.79 R10.1@8682.28,3919.29 ; R10.1@8700.39,3918.5 8781.5,3999.61 U5.4@8781.5,4072.83
NetR14_2: R14.2 R16.2 U6.4 | length 215.7
  Top Layer w10: U6.4@8905.51,3550.79 R14.2@8977.56,3478.74 ; R14.2@8943.31,3464.17 R16.2@9057.09,3464.17
NetR19_1: R19.1 U12.7 | length 158.7
  Top Layer w10: R19.1@8730.32,4963.39 8790.94,4963.39 8836.61,4917.72 U12.7@8836.61,4884.25
NetU5_13: U5.13 U5.21 | length 341
  Top Layer w10: U5.21@8884.25,4402.36 8884.25,4294.88 9011.81,4167.32 U5.13@9011.81,4114.17
NetU5_14: U5.14 U5.19 | length 316.6
  Top Layer w10: U5.19@8934.25,4386.22 8934.25,4293.7 9037.01,4190.95 U5.14@9037.01,4112.2
NetU5_17: U5.17 U5.22 | length 287
  Top Layer w10: U5.22@8857.09,4428.35 8857.09,4494.49 8872.44,4509.84 8972.44,4509.84 8986.61,4495.67 U5.17@8986.61,4416.54
NetU5_18: U5.18 U5.20 | length 192.5
  Top Layer w10: U5.20@8909.45,4391.73 8909.45,4469.29 8921.65,4481.5 8949.21,4481.5 8960.63,4470.08 U5.18@8960.63,4416.14
NO1: K1.3 P2.3 | length 596.5
  Top Layer w10: P2.3@9645.67,4016.93 9718.9,4090.16 9718.9,4105.12 ; K1.3@9673.23,4561.81 9718.9,4516.14 9718.9,4102.76
NRST: C33.2 P6.5 R22.2 U9.3 | length 1896.1
  Top Layer w10: U9.3@9561.82,5340.95 9561.82,5461.43 9595.28,5494.88 9791.34,5494.88 9843.31,5546.85 R22.2@9931.89,5546.85 ; R22.2@9930.32,5563.78 10084.25,5563.78 10638.58,6118.11 P6.5@11070.87,6118.11
PIR: P5.4 U9.42 | length 399
  Top Layer w10: U9.42@9679.92,5177.56 v1@9721.65,5177.56
  Bottom Layer w10: v1@9724.02,5176.77 10025.59,5176.77 P5.4@10064.96,5137.4
  other v1: 9722.05,5177.17
RF433_IN: U9.13 U11.2 U11.3 | length 2208.8
  Top Layer w10: U9.13@9299.61,5294.82 v1@9299.61,5314.96 ; v1@9709.05,5046.85 9741.73,5014.17 9955.91,5014.17 10011.81,5070.08 10097.24,5070.08 10166.93,5139.76 10776.38,5139.77 10983.86,4932.28 U11.2@11049.61,4932.28
  Top Layer w20: U11.3@11027.23,4841.18 U11.2@11051.79,4932.83
  Bottom Layer w10: v1@9300.79,5316.54 9300.79,5166.93 9420.87,5046.85 v1@9703.15,5046.85
  other v1: 9705.51,5047.24 9300.39,5315.35
RFR_VCC: 3.3V.1 C8.2 C11.1 C20.1 C21.1 C22.1 C23.2 C25.2 C28.1 C29.1 C30.1 C31.2 C32.2 P3.1 P5.1 P6.1 R1.1 R8.2 R9.2 R12.2 R13.2 R19.2 R21.1 R22.1 U2.2 U2.4 U4.8 U5.10 U5.15 U5.23 U9.8 U9.33 U9.43 U9.44 U11.4 U12.8 | length 2436.4
  Top Layer w10: v1@8620.08,5056.3 C25.2@8663.39,5056.3 ; C25.2@8657.48,5051.57 8657.48,4942.13 8729.53,4870.08 U12.8@8789.76,4870.08 ; U5.10@8934.72,4097.26 v1@8934.72,4154.06 ; v1@8967.59,6312.16 R8.2@8967.59,6447.04 ; U9.8@9463.79,5340.94 9463.79,5418.91 v1@9487.4,5442.52 ; C31.2@9542.52,4864.96 U9.33@9542.52,4997.64 ; C29.1@9550,4792.91 C31.2@9550,4850.39 ; U9.43@9626.38,5196.46 U9.44@9626.38,5217.32 ; U9.44@9667.72,5216.53 v1@9955.51,5216.54 ; R21.1@9742.82,5626.99 v1@9742.82,5674.31 ; R22.1@9923.53,5621.87 v1@9923.53,5669.2 ; R1.1@9944.88,4662.6 v1@10012.6,4662.6 ; R12.2@10176.38,6048.72 v1(10244.03,6048.84) ; R12.2@10177.08,6039.5 R13.2@10177.08,6138.71
  Top Layer w20: C28.1@10896.85,4767.32 10991.73,4767.32 U11.4@11024.02,4735.04
  Top Layer w30: C23.2@9048.25,5900.79 9048.25,6078.17 C21.1@9117.32,6147.24 ; C23.2@9051.97,5897.42 U4.8@9276.77,5897.42 ; v1@10459.06,4997.24 U2.2@10511.81,4997.24
  Top Layer w40: C11.1@10718.9,4675.98 U2.4@10718.9,4973.23
  other v1: 9155.51,3930.71 8934.25,4157.87 8833.07,4343.7 9037.8,4345.67 10013.39,4662.2 10694.88,4730.31 9516.54,4775.59 10900.39,4798.82 10459.06,4997.64 8619.69,5056.69 9955.51,5217.32 9488.98,5442.52 9924.02,5673.23 9741.73,5675.2 9077.95,6152.76 8966.1,6309.65
RL1: R4.1 R6.1 U9.32 | length 672.8
  Top Layer w10: R6.1@9242.22,4533.33 R4.1@9356.79,4533.33 ; R4.1@9380.32,4522.44 9380.32,4771.26 9522.83,4913.78 U9.32@9522.83,5021.65
SSP0_MISO: U9.26 U12.2 | length 667.2
  Top Layer w10: v1@9048.82,4868.5 9300.39,4868.5 9405.12,4973.23 U9.26@9405.12,4995.28
  Bottom Layer w10: v1@8840.16,4764.17 8943.7,4764.17 v1@9044.09,4864.57
  other v1: 8841.34,4762.6 9048.03,4868.9
SSP0_MOSI: U9.27 U12.5 | length 576.5
  Top Layer w10: U12.5@8930.32,4847.24 9313.39,4847.24 9424.02,4957.87 U9.27@9424.02,4994.88
SSP0_SCK: U9.31 U12.6 | length 766.5
  Top Layer w10: U12.6@8887.01,4820.47 8922.83,4784.65 9368.9,4784.65 9503.15,4918.9 U9.31@9503.15,4998.82
SWCLK: P6.4 U9.28 | length 2448.3
  Top Layer w10: v1@9444.11,4972.43 U9.28@9444.11,5011.67 ; v1@10123.03,5544.29 10616.93,6038.19 P6.4@11104.72,6038.19
  Bottom Layer w10: v1@9446.06,4978.34 10096.46,4978.35 10124.02,5005.91 v1@10124.02,5539.37
  other v1: 9445.28,4975.2 10124.02,5544.49
SWDIO: P6.3 U9.38 | length 2101.5
  Top Layer w10: U9.38@9650.79,5099.21 9705.12,5099.21 v1@9718.11,5086.22 ; v1@9676.38,5410.63 9708.27,5442.52 10075.98,5442.52 10607.87,5974.41 P6.3@11129.92,5974.41
  Bottom Layer w10: v1@9675.59,5409.45 9675.59,5125.59 v1@9716.54,5084.65
  other v1: 9717.72,5083.86 9677.56,5412.2
U0_RXD: J1.2 U9.46 | length 836.6
  Top Layer w10: U9.46@9656.3,5256.3 9749.61,5256.3 9785.43,5292.12 v1@10331.89,5292.13
  Bottom Layer w10: v1@10331.72,5293.05 J1.2@10404.83,5419.67
  other v1: 10331.89,5293.31
U0_TXD: J1.1 U9.47 | length 714.7
  Top Layer w10: U9.47@9656.69,5275.2 9743.31,5275.2 9778.35,5310.24 v1@10252.36,5310.24
  Bottom Layer w10: v1@10253.94,5316.93 J1.1@10306.22,5407.49
  other v1: 10252.76,5310.63
VCC5V: 5V.1 C3.1 C7.2 C9.1 C10.1 D2.2 K1.5 L1.2 L2.2 P7.1 P7.2 R2.2 R7.1 R11.2 U2.3 U5.7 U6.6 | length 5465.4
  Top Layer w10: v1@8794.88,3786.61 R11.2@8794.88,3824.8 ; v1@8796.85,3738.98 8941.73,3738.98 9075.59,3605.12 U6.6@9092.52,3605.12 ; U5.7@8857.87,4123.62 8857.87,4154.72 v1@8910.63,4207.48 ; v1@8858.27,4024.02 U5.7@8858.27,4074.41 ; v1@9159.45,4221.26 9194.63,4186.08 D2.2@9241.44,4186.08
  Top Layer w20: P7.2@8118.9,4577.95 8475.2,4577.95 8556.69,4496.46 8556.69,4146.85 R7.1@8610.63,4092.91 ; v1@8621.26,4053.15 R7.1@8621.26,4100.39 ; L1.2@10164.96,4166.14 C3.1@10164.96,4309.06
  Top Layer w40: L1.2@10199.61,4201.58 R2.2@10512.6,4201.57 ; R2.2@10504.33,4218.11 C9.1@10504.33,4454.72 ; C9.1@10521.26,4475.98 U2.3@10521.26,4898.82
  Bottom Layer w10: v1@8794.73,3740.55 v1@8794.73,3784.25 ; v1@8795.28,3783.38 8795.28,3966.93 v1@8859.45,4031.1
  Bottom Layer w20: v1@8622.64,4050.2 8789.17,4216.73
  Bottom Layer w30: 8605.51,4219.29 10280.71,4219.29 5V.1@10450.79,4389.37 ; 9561.22,4218.31 9665.64,4322.73 K1.5@9665.64,4469.23
  other v1: 8794.88,3738.19 8794.88,3783.86 8858.66,4030.31 8620.87,4050 8905.91,4201.18 9159.45,4221.65
VCC12V: 12V.1 C4.1 C5.2 D1.2 U1.2 U1.3 | length 464.6
  Top Layer w10: 10638.19,3923.62 10691.34,3923.62
  Top Layer w40: D1.2@10508.27,3770.47 C4.1@10664.57,3770.47 ; C4.1@10668.11,3768.9 10838.98,3768.9 ; C4.1@10686.22,3784.66 10686.22,3868.9
VCC_SIG: C2.1 L1.1 P4.1 | length 536.4
  Top Layer w10: P4.1@9859.68,4019.45 9916.93,3962.2 10007.48,3962.2 10070.08,4024.8
  Top Layer w20: 10070.08,4024.8 C2.1@10070.08,4301.18
WIFI_NPD: R9.1 U4.3 U9.10 | length 1292.9
  Top Layer w10: R9.1@9048.82,6359.84 9183.43,6359.84 U4.3@9263.54,6279.73 ; v1@9213.39,5808.27 9213.39,5638.58 9423.62,5428.35 U9.10@9423.62,5359.45
  Bottom Layer w10: v1@9212.6,5815.35 v1@9212.6,6324.41
  other v1: 9212.6,5810.24 9211.81,6327.17
WIFI_NRST: R8.1 U4.1 U9.11 | length 1426.8
  Top Layer w10: R8.1@9033.86,6452.33 U4.1@9263.26,6452.33 ; v1@9182.68,5846.46 9182.68,5631.1 9403.54,5410.24 U9.11@9403.54,5350
  Bottom Layer w10: v1@9181.5,5844.49 v1@9181.5,6453.94
  other v1: 9183.07,5846.46 9180.71,6453.94
WIFI_RXD: U4.21 U9.9 | length 1592.6
  Top Layer w10: U9.9@9443.31,5363.39 9443.31,5746.06 9510.56,5813.32 9997.38,5813.32 10035.52,5851.46 10035.52,6295.21 U4.21@9943.37,6387.36
WIFI_TXD: U4.22 U9.14 | length 1902.4
  Top Layer w10: v1@9252.76,5446.06 9252.76,5296.85 9274.41,5275.2 U9.14@9321.65,5275.2 ; v1@9409.45,5504.72 9409.45,5757.09 9487.01,5834.65 9683.46,5834.65 ; 9686.14,5835.03 9986.25,5835.03 10007.96,5856.75 v1@10007.96,6286.02
  Bottom Layer w10: v1@9252.36,5449.61 9277.56,5474.8 9382.68,5474.8 v1@9409.06,5501.18 ; v1@9959.24,6449.44 10007.12,6401.55 v1@10007.12,6290.58
  other v1: 9251.57,5448.43 9408.27,5502.36 10007.96,6289.36 9960.08,6447.49
pads on no net: P7.7 P7.8 P7.9 U4.2 U4.4 U4.5 U4.6 U4.7 U4.19 U4.20 U5.8 U5.12 U5.24 U5.25 U5.26 U5.28 U9.1 U9.2 U9.6 U9.7 U9.12 U9.15 U9.16 U9.17 U9.18 U9.19 U9.24 U9.35 U9.37
copper on no net:
  other v1: 10882.68,4451.97

## Polygon pours and split planes (outlines as drawn)
RFR_VCC on VCC "Top Layer-No Net" (hatched 90Degree grid 20 track 20, remove dead copper, pour order 1000): 7725.86,6867.7 7731.37,6862.19 7731.37,3255.1 11643.97,3255.1 11649.48,3260.61 11654.99,3266.12 11654.99,6862.19
GND on GND "Top Layer-No Net" (hatched 90Degree grid 20 track 20, remove dead copper, pour order 1001): 7525.44,6857.95 7536.46,6846.93 7536.46,3185.12 11726.62,3185.12 11732.13,3179.61 11732.13,6863.46

## Keep-outs
Keep-Out Layer:
  circle w2.5: c-4053.5,-2766.5 r1.25
  circle w5: c11012.71,4261.76 r59.06
  circle w5: c8421.45,4261.76 r59.06
  lines w5: 9150,6815 10275,6815 ; 9159.84,6815.53 ccw(c9717.08,5009.79) 7993.04,4235.91 cw(c7971.13,4106.74) 8087.51,4166.93 ccw(c9717.08,5009.79) 8272.49,3878.82 cw(c8170.37,3805.04) 8291.25,3769.54 ccw(c9717.08,5009.79) 8903.85,3303.95 9360.67,3305 9360.67,3835.16 9715,3835.16 10069.33,3835.16 10069.33,3303.95 ; 10070,3303.95 10530.31,3303.95 ccw(c9717.08,5009.79) 11249.3,3903.66 cw(c11372.12,3949.28) 11261.81,4019.96 ccw(c9717.08,5009.79) 11418.82,4324.22 cw(c11533.78,4272.68) 11504.08,4395.11 ccw(c9717.08,5009.79) 10265.94,6818.09 ; 8177.89,4872.76 cw(c8344.56,4887.6) 8511.22,4902.43 ccw(c9717.08,5009.79) 8524.84,4799.56 cw(c8360.06,4770.51) 8195.28,4741.45 cw(c9717.08,5009.79) 8177.89,4872.76 ; 10886.94,5321.34 cw(c9717.08,5009.79) 10909.32,5220.01 ccw(c11074.1,5249.07) 11238.88,5278.12 ccw(c9717.08,5009.79) 11210.31,5407.46 ccw(c11048.62,5364.4) 10886.94,5321.34
  lines w10: 9332.49,6762.06 9332.49,6554.38 9894.09,6554.38 9894.1,6760.63 9333.87,6760.63

## Other copper
Top Layer:
  region net GND: 9371.65,6480.23 9371.65,5872.44 9848.67,5872.44 9848.67,6480.23
  rectangle net GND: 9396.06,5087.8 9587.01,5282.68

## Silkscreen, mask and mechanical layers (free items; w line width, h text height)
Top Overlay:
  text "WG-DH-MB V1.0" at 8383.46,5632.68 h40
  text "2016.07.08" at 8423.62,5527.56 h40
  text "RXD" at 10414.96,5510.63 h30 r90
  text "GND" at 10521.65,5509.06 h30 r90
  text "TXD" at 10312.99,5506.3 h30 r90
  text "COM" at 9811.02,3855.91 h30
  text "IN" at 9930.32,3855.91 h30
  text "NO" at 9632.28,3851.97 h30
  text "COM" at 9520.87,3851.18 h30
  text "NC" at 9440.16,3850.39 h30
Mechanical 1:
  circle w5.98: c-17.81,-71.99 r168.08
Mechanical 6:
  circle w2.5: c234.12,1873.68 r1.25
  circle w2.5: c-462.36,1830.92 r1.25

## Text inside footprints (layer, text, board x,y; h text height)
C1: Mechanical 7 "2" at 10489.53,4001.57 h25 r90; Mechanical 7 "1" at 10489.53,3914.97 h25 r90
C2: Mechanical 7 "2" at 10082.83,4390.15 h25 r90; Mechanical 7 "1" at 10082.83,4303.55 h25 r90
C19: Mechanical 7 "2" at 8965.2,3818.12 h25 r270; Mechanical 7 "1" at 8965.2,3904.72 h25 r270
C22: Mechanical 7 "2" at 8965.36,5999.76 h25 r180; Mechanical 7 "1" at 9051.96,5999.76 h25 r180
C25: Mechanical 7 "1" at 8738.57,5065.12 h25 r180; Mechanical 7 "2" at 8651.98,5065.12 h25 r180
C34: Mechanical 7 "1" at 9643.15,5629.52 h25 r270; Mechanical 7 "2" at 9643.15,5542.92 h25 r270
D1: Mechanical 8 "1" at 10490.16,3592.02 h25 r90; Mechanical 8 "2" at 10490.16,3752.02 h25 r90; Mechanical 11 "4.06" at 10385.16,3722.02 h45 r90; Mechanical 11 "160.00" at 10385.16,3557.02 h45 r90
D2: Mechanical 8 "1" at 9374.94,4188.19 h25 r180; Mechanical 8 "2" at 9255.34,4188.19 h25 r180
D3: Mechanical 8 "1" at 10173.91,3919.69 h25; Mechanical 8 "2" at 10333.91,3919.69 h25; Mechanical 11 "4.06" at 10303.91,4024.69 h45; Mechanical 11 "160.00" at 10138.91,4024.68 h45
L1: Mechanical 8 "2" at 10200.2,4114.57 h25 r90; Mechanical 8 "1" at 10090.2,4114.57 h25 r90
L2: Mechanical 8 "2" at 10385.04,4191.93 h25 r180; Mechanical 8 "1" at 10385.04,4081.93 h25 r180
P5: Top Overlay "5" at 10061.42,5301.18 h30; Top Overlay "1" at 10072.05,4743.7 h30
P7: Top Overlay "2" at 8126.38,4658.27 h30 r90; Top Overlay "1" at 8198.42,4664.57 h30 r90; Top Overlay "9" at 8213.39,4162.2 h30 r90; Top Overlay "10" at 8146.85,4148.82 h30 r90
Q1: Mechanical 8 "3" at 9346.87,4335.2 h25 r270; Mechanical 8 "1" at 9257.07,4375.4 h25 r270; Mechanical 8 "2" at 9257.07,4295 h25 r270
R1: Mechanical 7 "1" at 9950.24,4668.1 h25 r270; Mechanical 7 "2" at 9950.24,4581.5 h25 r270
R2: Mechanical 7 "1" at 10588.97,4227.32 h25 r180; Mechanical 7 "2" at 10502.37,4227.32 h25 r180
R3: Mechanical 7 "2" at 9946.45,4143.54 h25; Mechanical 7 "1" at 9859.85,4143.54 h25
R4: Mechanical 7 "1" at 9341.97,4538.57 h25 r270; Mechanical 7 "2" at 9341.97,4451.98 h25 r270
R5: Mechanical 7 "2" at 10588.97,4110.08 h25; Mechanical 7 "1" at 10502.37,4110.08 h25
R6: Mechanical 7 "1" at 9245.51,4538.57 h25 r270; Mechanical 7 "2" at 9245.51,4451.98 h25 r270
R7: Mechanical 7 "1" at 8630.47,4097.25 h25 r90; Mechanical 7 "2" at 8630.47,4183.85 h25 r90
R8: Mechanical 7 "1" at 9046.98,6467.47 h25 r180; Mechanical 7 "2" at 8960.38,6467.47 h25 r180
R9: Mechanical 7 "2" at 8962.89,6374.21 h25 r180; Mechanical 7 "1" at 9049.49,6374.21 h25 r180
R10: Mechanical 7 "1" at 8693.15,3907.47 h25 r270; Mechanical 7 "2" at 8693.15,3820.87 h25 r270
R11: Mechanical 7 "2" at 8783.31,3820.87 h25 r270; Mechanical 7 "1" at 8783.31,3907.47 h25 r270
R12: Mechanical 7 "1" at 10093.55,6040.79 h25; Mechanical 7 "2" at 10180.15,6040.78 h25
R13: Mechanical 7 "1" at 10094.39,6130.7 h25; Mechanical 7 "2" at 10180.99,6130.7 h25
R14: Mechanical 7 "2" at 8970.07,3454.17 h25; Mechanical 7 "1" at 8883.47,3454.17 h25
R15: Mechanical 7 "2" at 10092.16,5971.98 h25 r180; Mechanical 7 "1" at 10178.76,5971.98 h25 r180
R16: Mechanical 7 "1" at 9127.16,3474.17 h25 r180; Mechanical 7 "2" at 9040.56,3474.17 h25 r180
R17: Mechanical 7 "2" at 9073.71,3907.47 h25 r90; Mechanical 7 "1" at 9073.71,3820.87 h25 r90
R19: Mechanical 7 "2" at 8651.98,4974.57 h25 r180; Mechanical 7 "1" at 8738.57,4974.57 h25 r180
R21: Mechanical 7 "1" at 9732.91,5629.91 h25 r270; Mechanical 7 "2" at 9732.91,5543.32 h25 r270
R22: Mechanical 7 "1" at 9912.44,5629.91 h25 r270; Mechanical 7 "2" at 9912.44,5543.32 h25 r270
U1: Mechanical 8 "4" at 10613.46,4004.94 h25; Mechanical 8 "1" at 10539.46,3902.94 h25; Mechanical 8 "2" at 10576.46,3902.94 h25; Mechanical 8 "3" at 10613.46,3902.94 h25
U2: Mechanical 10 "2" at 10516.11,5008.82 h25 r270; Mechanical 10 "4" at 10745.91,5008.82 h25 r270; Mechanical 10 "3" at 10516.11,4918.62 h25 r270; Mechanical 10 "1" at 10516.11,5099.02 h25 r270
U6: Mechanical 15 "1" at 9018.89,3621.09 h29.53 r90
U9: Mechanical 8 "27" at 9424.01,5042.4 h25 r270; Mechanical 8 "26" at 9404.71,5042.4 h25 r270; Mechanical 8 "25" at 9385.01,5042.4 h25 r270; Mechanical 8 "48" at 9657.91,5315.3 h25 r270; Mechanical 8 "2" at 9581.91,5362.4 h25 r270; Mechanical 8 "31" at 9502.71,5042.4 h25 r270; Mechanical 8 "15" at 9327.91,5276.3 h25 r270; Mechanical 8 "42" at 9657.91,5197.6 h25 r270; Mechanical 8 "37" at 9657.91,5099.5 h25 r270; Mechanical 8 "47" at 9657.91,5295.6 h25 r270; Mechanical 8 "45" at 9657.91,5256.2 h25 r270; Mechanical 8 "16" at 9327.91,5256.2 h25 r270; Mechanical 8 "46" at 9657.91,5276.3 h25 r270; Mechanical 8 "13" at 9327.91,5315.3 h25 r270; Mechanical 8 "20" at 9327.91,5177.5 h25 r270; Mechanical 8 "19" at 9327.91,5197.6 h25 r270; Mechanical 8 "11" at 9404.71,5372.4 h25 r270; Mechanical 8 "10" at 9424.01,5372.4 h25 r270; Mechanical 8 "17" at 9327.91,5236.5 h25 r270; Mechanical 8 "6" at 9502.71,5362.4 h25 r270; Mechanical 8 "7" at 9483.11,5362.4 h25 r270; Mechanical 8 "29" at 9463.82,5042.4 h25 r270; Mechanical 8 "38" at 9657.91,5119.2 h25 r270; Mechanical 8 "3" at 9561.82,5362.4 h25 r270; Mechanical 8 "40" at 9657.91,5158.6 h25 r270; Mechanical 8 "41" at 9657.91,5177.5 h25 r270; Mechanical 8 "5" at 9522.82,5362.4 h25 r270; Mechanical 8 "34" at 9561.82,5042.4 h25 r270; Mechanical 8 "44" at 9657.91,5236.5 h25 r270; Mechanical 8 "8" at 9463.82,5362.4 h25 r270; Mechanical 8 "22" at 9327.91,5138.5 h25 r270; Mechanical 8 "14" at 9327.91,5295.6 h25 r270; Mechanical 8 "9" at 9444.11,5362.4 h25 r270; Mechanical 8 "23" at 9327.91,5119.2 h25 r270; Mechanical 8 "24" at 9327.91,5099.5 h25 r270; Mechanical 8 "18" at 9327.91,5217.2 h25 r270; Mechanical 8 "21" at 9327.91,5158.6 h25 r270; Mechanical 8 "28" at 9444.11,5042.4 h25 r270; Mechanical 8 "36" at 9600.82,5042.4 h25 r270; Mechanical 8 "30" at 9483.11,5042.4 h25 r270; Mechanical 8 "33" at 9541.71,5042.4 h25 r270; Mechanical 8 "43" at 9657.91,5217.2 h25 r270; Mechanical 8 "4" at 9541.71,5362.4 h25 r270; Mechanical 8 "1" at 9600.82,5362.4 h25 r270; Mechanical 8 "35" at 9581.91,5042.4 h25 r270; Mechanical 8 "12" at 9385.01,5372.4 h25 r270; Mechanical 8 "39" at 9657.91,5138.5 h25 r270; Mechanical 8 "32" at 9522.82,5042.4 h25 r270